# Altium PCB PCB2.PcbDoc
Units mil, origin at the board's own origin, x right, y up, seen from the top; angles counter-clockwise.
Board outline 3149.61 x 1574.8 mil, 4 copper layers (Top Layer, Layer 1, Layer 2, Bottom Layer), stack 64.756 mil thick; 13 components, 10 nets, 142 pads, 436 vias.
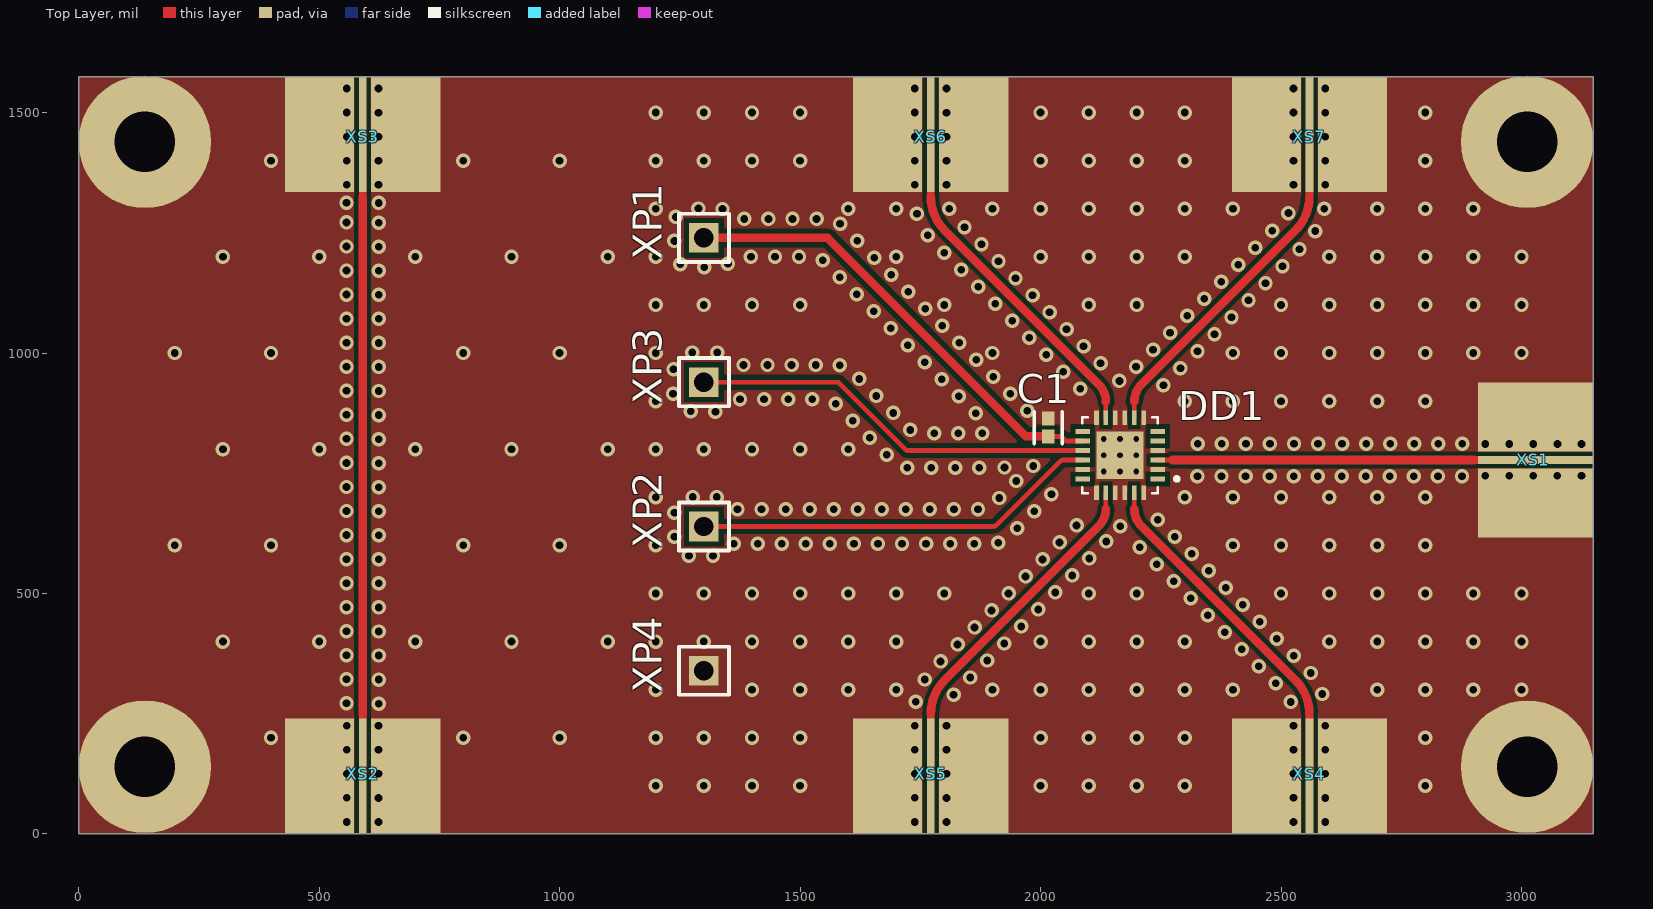
[diagram p0: Top Layer view]
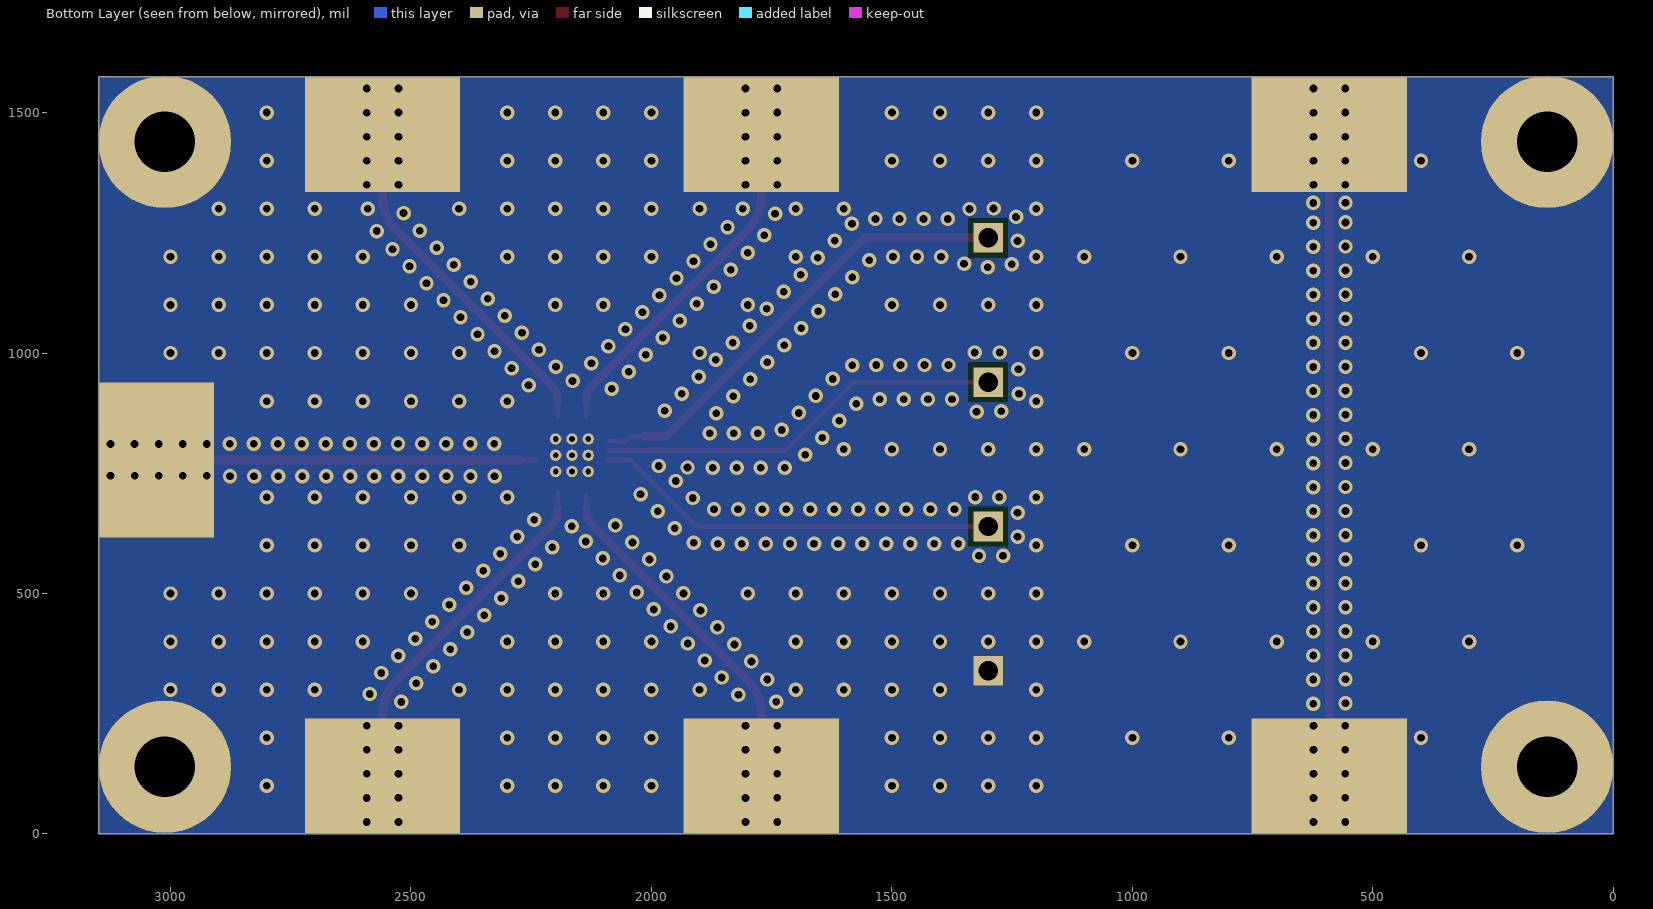
[diagram p1: Bottom Layer view, seen from below]
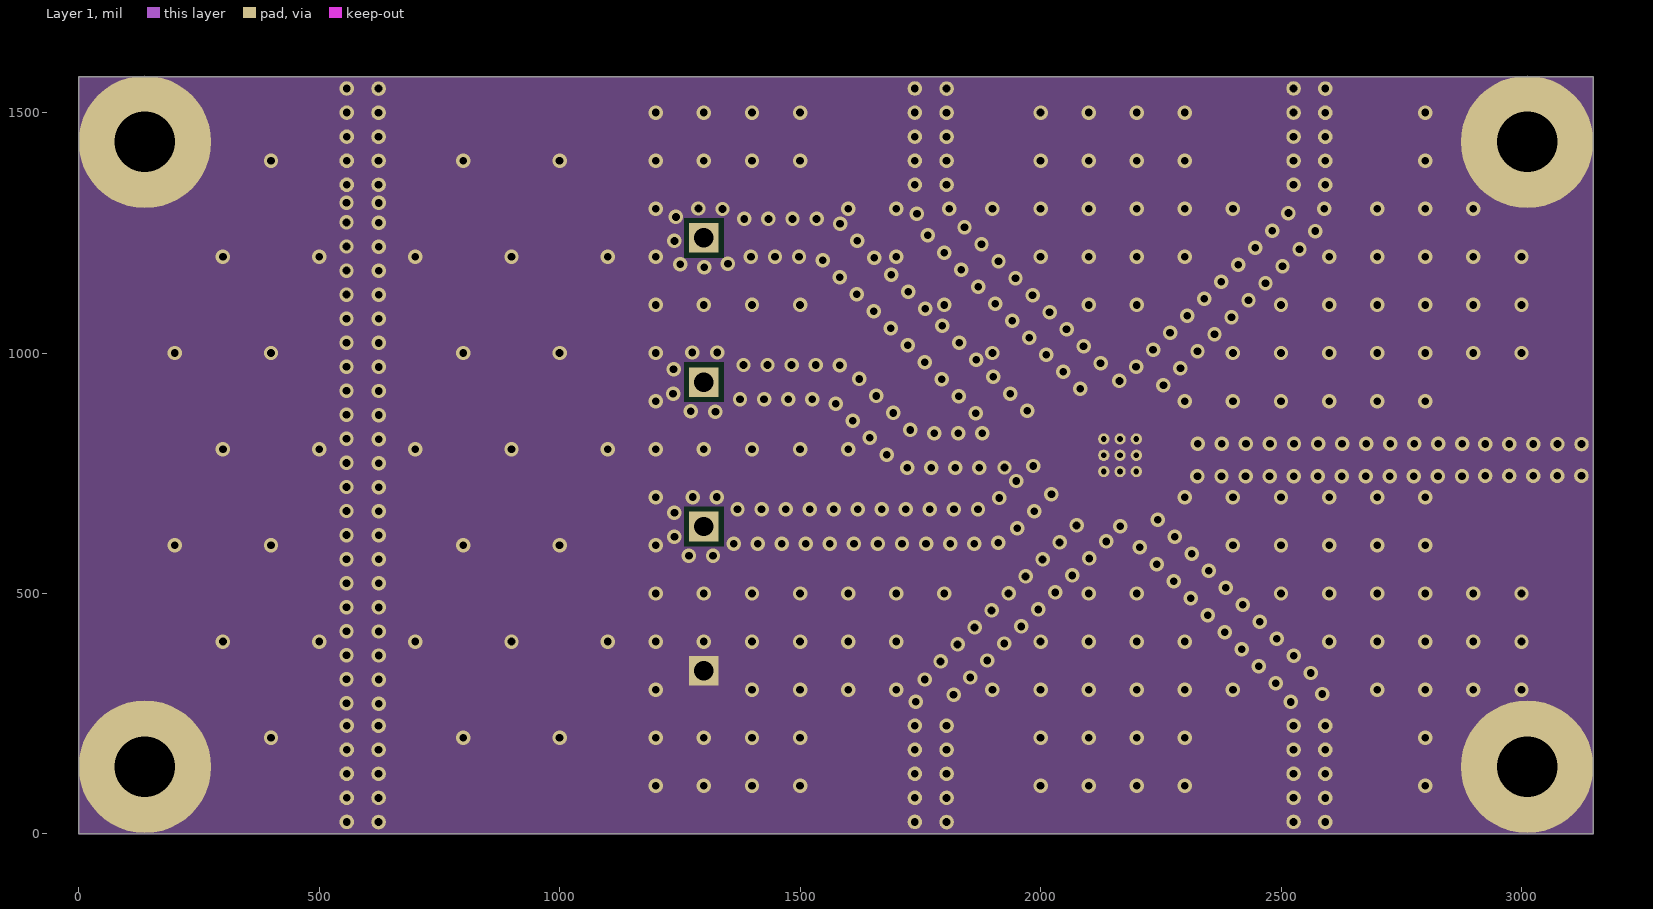
[diagram p2: Layer 1]
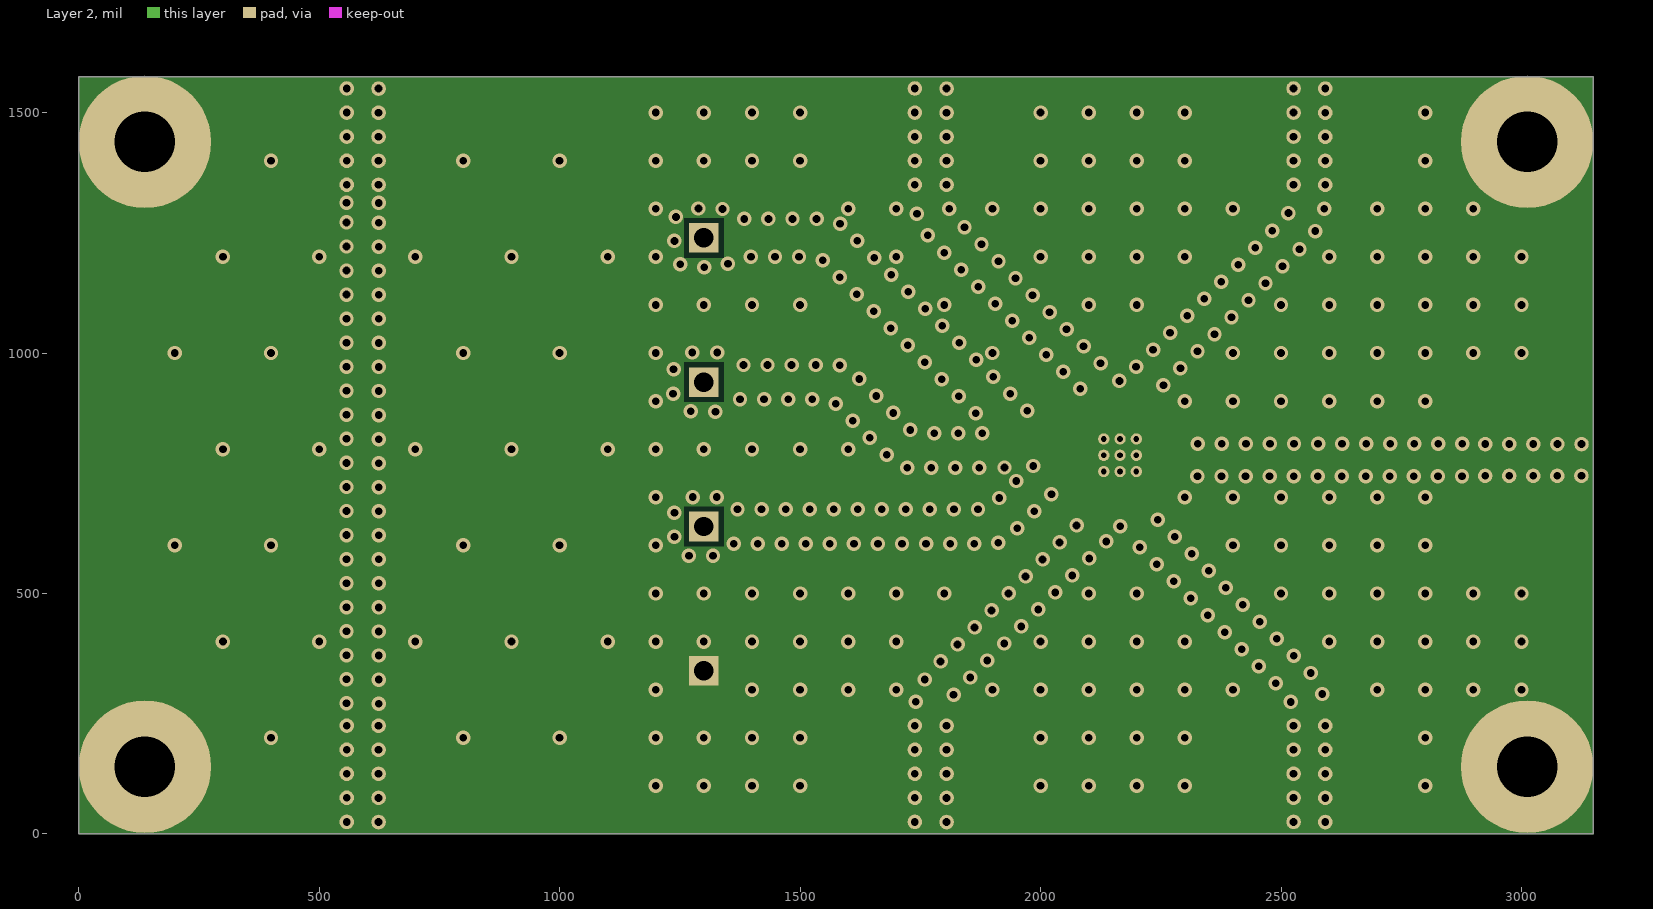
[diagram p3: Layer 2]
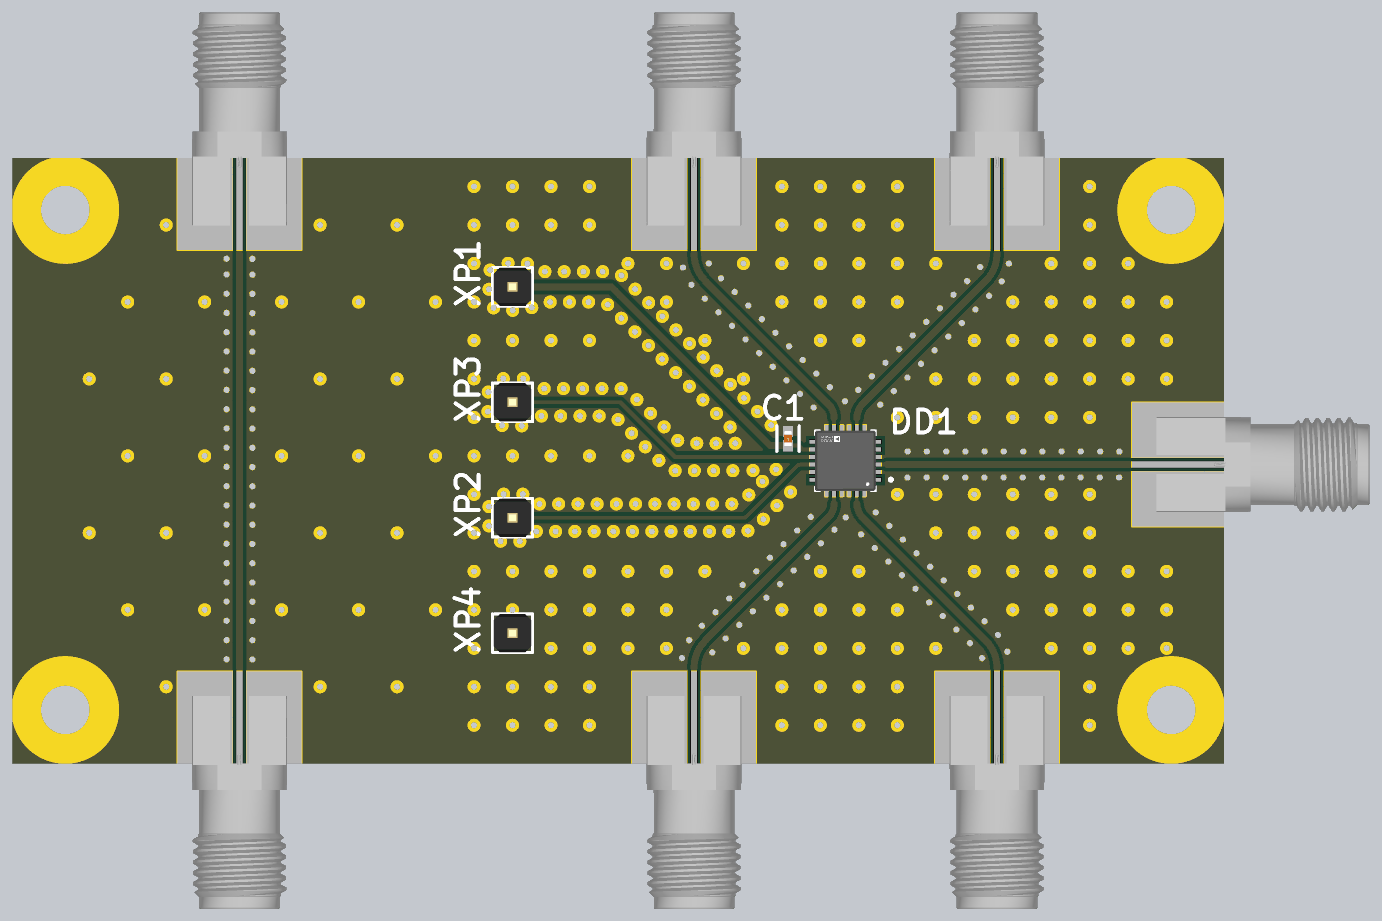
[diagram p4: 3D render of the assembled board from above, using the file's embedded part models]

## Layer stack, top to bottom
Top Solder: solder mask 0.4, Solder Resist, Dk 3.5
Top Layer: signal copper 0.689
Dielectric 2: prepreg 10, RO4450B, Dk 3.54
Layer 1: signal copper 0.689
Dielectric 1: core 42, FR408, Dk 4
Layer 2: signal copper 0.689
Dielectric 3: prepreg 10, RO4450B, Dk 3.54
Bottom Layer: signal copper 0.689
Bottom Solder: solder mask 0.4, Solder Resist, Dk 3.5

## Board outline
0,0 3149.61,0 3149.61,1574.8 0,1574.8

## Design rules (kind name [scope] priority, off if disabled: settings)
AcuteAngle [All] p1: minimum=6.00000000000000E+0001 checktracksonly=TRUE
Clearance Clearance_RF [InNetClass('RF')] p1: gap=9 ignorepadtopadclearanceinfootprint=FALSE
Clearance [All] p2: gap=10 ignorepadtopadclearanceinfootprint=TRUE except(0: Arc-Text Track-Text Text-Text; 3.5: Arc-Arc Arc-Track Track-Track; 5: Arc-SMDPad Arc-THPad Track-SMDPad Track-THPad SMDPad-SMDPad SMDPad-THPad SMDPad-Via SMDPad-Fill THPad-Via; 15: SMDPad-Text THPad-Text Via-Text Fill-Text Poly-Text Region-Text; 20: THPad-THPad)
DiffPairsRouting [All] p1: maxlimit=10 minlimit=10 mostfreqgap=10 toplayer_minwidth=3.94 toplayer_maxwidth=11.81 toplayer_prefwidth=7.87 midlayer1_minwidth=3.94 midlayer1_maxwidth=11.81 midlayer1_prefwidth=7.87 midlayer2_minwidth=3.94 midlayer2_maxwidth=11.81 midlayer2_prefwidth=7.87 bottomlayer_minwidth=3.94 bottomlayer_maxwidth=11.81 bottomlayer_prefwidth=7.87 maxuncoupledlength=500
HoleSize [All] p1: absolutevalues=TRUE maxlimit=250 minlimit=8 maxpercent=80.000 minpercent=20.000
MinimumAnnularRing [All] p1: minimumring=5.91
MinimumSolderMaskSliver [All] p1: minsoldermaskwidth=3.94
PolygonConnect [All] p1: connectstyle=Direct reliefconductorwidth=10 reliefentries=4 polygonreliefangle="90 Angle" airgapwidth=10
RoutingVias [All] p1: holewidth=16 width=32 viastyle="Through Hole" minholewidth=10 minwidth=18 maxholewidth=200 maxwidth=300
SilkToSolderMaskClearance [IsPad] p1: minsilkscreentomaskgap=6 clearancetoexposedcopper=TRUE
SolderMaskExpansion [All] p1: expansion=1.97 istentingtop=FALSE
UnpouredPolygon [All] p1: allowunpoured=TRUE
Width Width_RF [InNetClass('RF')] p1: maxlimit=18 minlimit=9 preferedwidth=18 midlayer1_minwidth=9.79 midlayer1_maxwidth=9.79 midlayer1_prefwidth=9.79 midlayer2_minwidth=9.79 midlayer2_maxwidth=9.79 midlayer2_prefwidth=9.79 impedanceprofiledriven=TRUE impedanceprofileid={30EF68C0-EA95-4A57-9805-3F07A52F887F} impedanceprofilevalue=50.000000 minimp=50.000000 maximp=50.000000 favimp=50.000000
Width Width_1 [All] p2: maxlimit=393.7 minlimit=10 preferedwidth=15.75
25 further rules are at their usual default settings.

## Classes and differential pairs
net class RF: NetXS2_1 RF1 RF2 RF3 RF4 RFC

## Components (designator, comment, footprint, x,y, rotation, side; value= is the part's Value field where it differs from the comment)
C1 "С-0402 1 нФ 50 В C0G TDK Corporation" FP-C0402--IPC_A 2016,845 r90 top
DD1 "HMC641ALP4 Analog Devices" "LFCSP 24 lead 4x4 mm" 2165.35,787.4 r180 top locked
XP1 "HDR-M-2.54_1X1 Yuandi" pinHeader-M-2.54_1X1 1300,1239.37 r90 top
XP2 "HDR-M-2.54_1X1 Yuandi" pinHeader-M-2.54_1X1 1300,639.37 r90 top
XP3 "HDR-M-2.54_1X1 Yuandi" pinHeader-M-2.54_1X1 1300,939.37 r90 top
XP4 "HDR-M-2.54_1X1 Yuandi" pinHeader-M-2.54_1X1 1300,339.37 r90 top
XS1 "901-10511-2 Amphenol RF" SMA 3149.61,777.56 r0 top
XS2 "901-10511-2 Amphenol RF" SMA 590.55,0 r270 top
XS3 "901-10511-2 Amphenol RF" SMA 590.55,1574.8 r90 top
XS4 "901-10511-2 Amphenol RF" SMA 2559.06,0 r270 top
XS5 "901-10511-2 Amphenol RF" SMA 1771.65,0 r270 top
XS6 "901-10511-2 Amphenol RF" SMA 1771.65,1574.8 r90 top
XS7 "901-10511-2 Amphenol RF" SMA 2559.06,1574.8 r90 top

## Footprints (in the part's own frame and the unit in brackets; to place one, negate y for a bottom-side part, rotate by r counter-clockwise, add the part's x,y. Pads: shape width x height; smd on the part's side, far side on the other; paste and mask are expansions set on the pad)
FP-C0402--IPC_A [mil]
  rect 29.11x26.48 smd paste+0 mask+0: 1(-18.37,0) 2(18.37,0)
  silkscreen extent -33,-29 33,29, body extent -41,-21 41,21, height 10
"LFCSP 24 lead 4x4 mm" [mm]
  rect 0.76x0.25 smd: 1(-1.98,1.25) 2(-1.98,0.75) 3(-1.98,0.25) 4(-1.98,-0.25) 5(-1.98,-0.75) 6(-1.98,-1.25) 13(1.98,-1.25) 14(1.98,-0.75) 15(1.98,-0.25) 16(1.98,0.25) 17(1.98,0.75) 18(1.98,1.25)
  rect 0.25x0.76 smd: 7(-1.25,-1.98) 8(-0.75,-1.98) 9(-0.25,-1.98) 10(0.25,-1.98) 11(0.75,-1.98) 12(1.25,-1.98) 19(1.25,1.98) 20(0.75,1.98) 21(0.25,1.98) 22(-0.25,1.98) 23(-0.75,1.98) 24(-1.25,1.98)
  round 0.6 hole 0.3 mask+0: 25(-0.86,0.86) 25(-0.86,0) 25(-0.86,-0.86) 25(0,0.86) 25(0,0) 25(0,-0.86) 25(0.86,0.86) 25(0.86,0) 25(0.86,-0.86)
  rect 2.5x2.5 smd paste-0.46: 25(0,0)
  silkscreen extent -3.1,-2 2,2, body extent -2,-2 2,2, height 1.02
pinHeader-M-2.54_1X1 [mm] "HDR-M-2.54_1X3"
  rect 1.57x1.57 hole 1.02 paste-2539.97 mask+0: 1(0,0)
  silkscreen extent -1.27,-1.32 1.27,1.32, body extent -1.27,-1.25 1.28,1.25, height 10.56
SMA [mm]
  rect 6.1x0.41 smd: 1(-3.048,0)
  round 0.77 hole 0.41 mask+0: 2(-5.72,-0.838) 2(-5.715,0.838) 2(-4.45,-0.838) 2(-4.445,0.838) 2(-3.18,-0.838) 2(-3.175,0.838) 2(-1.91,-0.838) 2(-1.905,0.838) 2(-0.635,-0.838) 2(-0.63,0.838)
  rect 6.1x3.65 smd: 2(-3.048,-2.275) 2(-3.048,2.275)
  rect 6.1x8.2 smd far side: 2(-3.048,0)
  body extent -4.48,-3.13 9.6,3.13, height 3.24

## Part data
C1: library part C0402_1000pF_50V_C1005C0G1H102F050BA, Capacitance="1 нФ", Manufacturer="TDK Corporation", Package=С-0402, Voltage="50 В", Material=C0G, Name=Capasitor
DD1: library part EV1HMC641ALP4, "IC RF SWITCH SP4T 20GHZ 24QFN", Manufacturer="Analog Devices", Package="24-lead, 4 mm × 4 mm LFCSP", Datasheet=https://www.analog.com/en/products/hmc641alp4e.html?doc=hmc641alp4e.pdf, Name=HMC641ALP4
XP1 XP2 XP3 XP4: library part HDR-M-2.54_1X1, "HDR-M-2.54_1X1", Manufacturer=Yuandi, Name=HDR-M-2.54_1X1
XS1 XS2 XS3 XS4 XS5 XS6 XS7: library part "SMA_Amphenol RF_901-10511-2", "SMA Connector Jack, Female Socket 50 Ohms Board Edge, End Launch Solder", Manufacturer="Amphenol RF", Name=901-10511-2

## Free pads (board coordinates)
  round 275.59 hole 125.98: 14(137.8,139.76) 14(137.8,1438.98) 14(3011.81,139.76) 14(3011.81,1438.98)

## Via types
v1: diameter 30, hole 16, Top Layer to Bottom Layer, 282 vias
v2: diameter 30, hole 16, Top Layer to Bottom Layer, tented both sides, 154 vias

## Nets (pads, with @x,y where several pads share a name; then routed paths per layer and width w, separated by ;. In a path a pad name is that pad's centre, name@x,y a point inside that pad or via, vN(x,y) a via of type N, cw(c..) or ccw(c..) an arc to the next point about the centre after c; other vN are vias at no path point)
CTLA: DD1.16 XP2.1 | length 843.8
  Top Layer w10: XP2.1 1901.23,639.37 ccw(c1901.23,649.37) 1908.28,642.28 2040.65,774.65 cw(c2047.7,767.56) 2047.7,777.56 DD1.16
CTLB: DD1.15 XP3.1 | length 846.3
  Top Layer w10: XP3.1 1579.63,939.37 1721.76,797.24 DD1.15
GND: C1.2 DD1.2 DD1.4 DD1.7 DD1.9 DD1.10 DD1.12 DD1.17 DD1.19 DD1.21 DD1.22 DD1.24 DD1.25 pad.14 XP4.1 XS1.2 XS2.2 XS3.2 XS4.2 XS5.2 XS6.2 XS7.2
  other v1: 1200,100 1300,100 1400,100 1500,100 2000,100 2100,100 2200,100 2300,100 2800,100 400,200 800,200 1000,200 1200,200 1300,200 1400,200 1500,200 2000,200 2100,200 2200,200 2300,200 2800,200 1200,300 1400,300 1500,300 1600,300 1700,300 1900,300 2000,300 2100,300 2200,300 2300,300 2400,300 2700,300 2800,300 2900,300 3000,300 300,400 500,400 700,400 900,400 1100,400 1200,400 1300,400 1400,400 1500,400 1600,400 1700,400 2000,400 2100,400 2200,400 2300,400 2600,400 2700,400 2800,400 2900,400 3000,400 1200,500 1300,500 1400,500 1500,500 1600,500 1700,500 1800,500 2100,500 2200,500 2500,500 2600,500 2700,500 2800,500 2900,500 3000,500 1268.95,578.22 1318.95,578.21 200,600 400,600 800,600 1000,600 1200,600 2400,600 2500,600 2600,600 2700,600 2800,600 1361.97,603.7 1411.97,603.7 1461.97,603.7 1511.97,603.7 1561.97,603.7 1611.97,603.7 1661.97,603.7 1711.97,603.7 1761.97,603.7 1811.97,603.7 1861.97,603.7 1911.94,605.35 1238.84,618.14 1951.88,635.43 1238.84,668.14 1987.23,670.79 1369.93,675.04 1419.93,675.04 1469.93,675.04 1519.93,675.04 1569.93,675.04 1619.93,675.04 1669.93,675.04 1719.93,675.04 1769.93,675.04 1819.93,675.04 1869.93,675.04 1914.08,698.52 1200,700 2300,700 2400,700 2500,700 2600,700 2700,700 2800,700 1276.92,700.53 1326.92,700.53 2022.59,706.14 1949.43,733.88 1722.67,761.57 1772.67,761.57 1822.67,761.57 1872.67,761.57 1925,762 1985,765 1680.35,788.2 300,800 500,800 700,800 900,800 1100,800 1200,800 1300,800 1400,800 1500,800 1600,800 1644.99,823.56 1778.87,832.91 1828.87,832.91 1878.87,832.91 1729.38,840.06 1609.64,858.91 1694.03,875.42 1865.59,874.91 1324,878 1273,879 1972.19,879.84 1574.28,894.27 1200,900 2300,900 2400,900 2500,900 2600,900 2700,900 2800,900 1375.18,903.7 1425.18,903.7 1475.18,903.7 1525.18,903.7 1830.23,910.26 1658.67,910.77 1236,915 1936.83,915.2 1623.32,946.13 1794.88,945.62 1901.48,950.55 1237,966 1382.34,975.04 1432.34,975.04 1482.34,975.04 1532.34,975.04 1582.34,974.78 1759.52,980.97 1866.12,985.91 200,1000 400,1000 800,1000 1000,1000 1200,1000 1900,1000 2400,1000 2500,1000 2600,1000 2700,1000 2800,1000 2900,1000 3000,1000 1276,1001 1328,1001 1724.17,1016.33 1830.77,1021.26 1688.81,1051.68 1795.41,1056.62 1653.45,1087.04 1760.06,1091.97 1200,1100 1300,1100 1400,1100 1500,1100 1800,1100 2100,1100 2200,1100 2500,1100 2600,1100 2700,1100 2800,1100 2900,1100 3000,1100 1618.1,1122.39 1724.7,1127.33 1582.74,1157.75 1689.35,1162.68 1300.55,1178.21 1250.95,1184.57 1350.04,1185.33 1547.39,1193.1 1653.99,1198.04 300,1200 500,1200 700,1200 900,1200 1100,1200 1200,1200 1397.86,1199.93 1447.86,1199.93 1497.86,1199.93 1700,1200 2000,1200 2100,1200 2200,1200 2300,1200 2600,1200 2700,1200 2800,1200 2900,1200 3000,1200 1238.84,1233.08 1618.64,1233.39 1583.22,1268.69 1384.25,1278.81 1434.25,1278.81 1484.25,1278.81 1534.25,1278.81 1241.89,1282.99 1200,1300 1338.74,1299.5 1600,1300 1700,1300 1900,1300 2000,1300 2100,1300 2200,1300 2300,1300 2400,1300 2700,1300 2800,1300 2900,1300 1288.71,1300.53 400,1400 800,1400 1000,1400 1200,1400 1300,1400 1400,1400 1500,1400 2000,1400 2100,1400 2200,1400 2300,1400 2800,1400 1200,1500 1300,1500 1400,1500 1500,1500 2000,1500 2100,1500 2200,1500 2300,1500 2800,1500
  other v2: 556.9,271.47 624,271 2520.4,274.47 1740.5,274.7 1819.21,289.41 2585.93,290.95 2488.86,313.27 556.9,321.47 624,321 1759.15,321.09 1853.95,325.37 2561.63,334.64 2453.5,348.62 1792.11,358.69 1889.31,360.72 556.9,371.47 624,371 2526.79,370.5 2418.15,383.98 1827.46,394.05 1924.66,396.08 2491.43,405.86 2382.79,419.33 556.9,421.47 624,421 1862.82,429.4 1960.02,431.43 2456.08,441.21 2347.44,454.69 1898.17,464.76 1995.37,466.79 556.9,471.47 624,471 2420.72,476.57 2312.08,490.04 1933.53,500.11 2030.73,502.15 2385.37,511.93 556.9,521.47 624,521 2276.73,525.4 1968.88,535.47 2066.08,537.5 2350.01,547.28 2241.37,560.75 556.9,571.47 624,571 2004.24,570.82 2101.44,572.86 2314.66,582.64 2206.02,596.11 2039.6,606.18 2136.79,608.21 2279.3,617.99 556.9,621.47 624,621 2166,640 2074.95,641.53 2243.94,653.35 556.9,671.47 624,671 556.9,721.47 624,721 2326.26,743.91 2376.26,743.91 2426.26,743.91 2476.26,743.91 2526.26,743.91 2576.26,743.91 2626.26,743.91 2676.26,743.91 2726.26,743.91 2776.26,743.91 2826.26,743.91 2876.26,743.91 556.9,771.47 624,771 2327,811.42 2377,811.42 2427,811.42 2477,811.42 2527,811.42 2577,811.42 2627,811.42 2677,811.42 2727,811.42 2777,811.42 2827,811.42 2877,811.42 556.9,821.47 624,821 556.9,871.47 624,871 556.9,921.47 624,921 2082.52,925.7 2255.57,933.08 2164,942 2047.17,961.05 2290.93,968.44 556.9,971.47 624,971 2198.67,971.35 2124.79,978.6 2011.81,996.41 2326.28,1003.8 2234.03,1006.7 2089.43,1013.95 556.9,1021.47 624,1021 1976.46,1031.76 2361.64,1039.15 2269.38,1042.06 2054.08,1049.31 1941.1,1067.12 556.9,1071.47 624,1071 2396.99,1074.51 2304.74,1077.41 2018.72,1084.67 1905.75,1102.47 2432.35,1109.86 2340.09,1112.77 1983.37,1120.02 556.9,1121.47 624,1121 1870.39,1137.83 2467.71,1145.22 2375.45,1148.13 1948.01,1155.38 556.9,1171.47 624,1171 1835.04,1173.18 2503.06,1180.57 2410.8,1183.48 1912.65,1190.73 1799.68,1208.54 2538.42,1215.93 2446.16,1218.84 556.9,1221.47 624,1221 1877.3,1226.09 1765.18,1244.73 2571.42,1253.49 2481.51,1254.19 1841.94,1261.44 556.9,1271.47 624,1271 1743.04,1289.56 2515.42,1290.94 1810.35,1300.2 2590.14,1299.85 556.9,1312.47 624,1312
NetC1_1: C1.1 DD1.14 XP1.1 | length 962
  Top Layer w10: C1.1 2039.23,826.63 cw(c2039.23,816.63) 2046.28,823.72 2049.25,820.75 2053.07,816.93 DD1.14
  Top Layer w18: XP1.1 1556.89,1239.37 1969.63,826.63 C1.1
NetXS2_1: XS2.1 XS3.1 | length 1334.8
  Top Layer w16: XS2.1 590.55,247.82 ; 590.55,1325.55 XS3.1
  Top Layer w18: 590.55,247.82 590.55,1325.55
RF1: DD1.23 XS4.1 | length 733.8
  Top Layer w9.8: 2194.88,676.17 DD1.23
  Top Layer w16: XS4.1 2559.06,249.23
  Top Layer w18: 2194.88,676.17 ccw(c2246.42,676.17) 2210,639.71 2529.74,319.97 cw(c2459.06,249.23) 2559.06,249.23
RF2: DD1.20 XS5.1 | length 730.5
  Top Layer w9.8: 2135.83,676.17 DD1.20@2135.83,706.17
  Top Layer w16: XS5.1 1771.65,249.23
  Top Layer w18: 1771.65,249.23 cw(c1871.65,249.23) 1800.97,319.97 2120.71,639.71 ccw(c2084.29,676.17) 2135.83,676.17
RF3: DD1.11 XS6.1 | length 724.5
  Top Layer w9.8: DD1.11 2135.83,895.35
  Top Layer w16: 1771.65,1331.54 XS6.1@1771.65,1339.09 ; XS6.1@1771.65,1339.15 XS6.1
  Top Layer w18: 1771.65,1325.57 ccw(c1871.65,1325.57) 1800.97,1254.84 2120.71,935.09 cw(c2084.29,898.63) 2135.83,898.63
RF4: DD1.8 XS7.1 | length 727.7
  Top Layer w9.8: DD1.8 2194.88,898.63
  Top Layer w16: 2559.06,1331.54 XS7.1@2559.06,1339.09 ; XS7.1@2559.06,1339.15 XS7.1
  Top Layer w18: 2194.88,898.63 cw(c2246.42,898.63) 2210,935.09 2529.74,1254.84 ccw(c2459.06,1325.57) 2559.06,1325.57
RFC: DD1.3 XS1.1 | length 786.3
  Top Layer w9.8: DD1.3 2273.56,777.56
  Top Layer w16: 2901.44,777.56 XS1.1
  Top Layer w18: 2273.56,777.56 2901.44,777.56
pads on no net: DD1.1 DD1.5 DD1.6 DD1.13 DD1.18

## Polygon pours and split planes (outlines as drawn)
GND on Layer 1 "GND_L02_P001" (solid, pour order 1): 0,1574.8 0.2,1574.61 3149.61,1574.61 3149.61,-0.2 0,-0.2 0,1574.61
GND on Layer 2 "GND_L03_P002" (solid, pour order 2): 0.2,1574.8 0.39,1574.61 3149.8,1574.61 3149.8,-0.2 0.2,-0.2 0.2,1574.61
GND on Bottom Layer "GND_L04_P003" (solid, pour order 3): 0,1574.8 0.2,1574.61 3149.61,1574.61 3149.61,-0.2 0,-0.2 0,1574.61
GND on Top Layer "GND_L01_P000" (solid, pour order 0): 0,1575 0.2,1574.8 3149.61,1574.8 3149.61,0 0,0 0,1574.8